# Altium PCB Temp_datalogger.PcbDoc
Units mil, origin at the board's own origin, x right, y up, seen from the top; angles counter-clockwise.
Board outline 1565 x 1538 mil, 2 copper layers (Top Layer, Bottom Layer); 49 components, 47 nets, 186 pads, 21 vias.
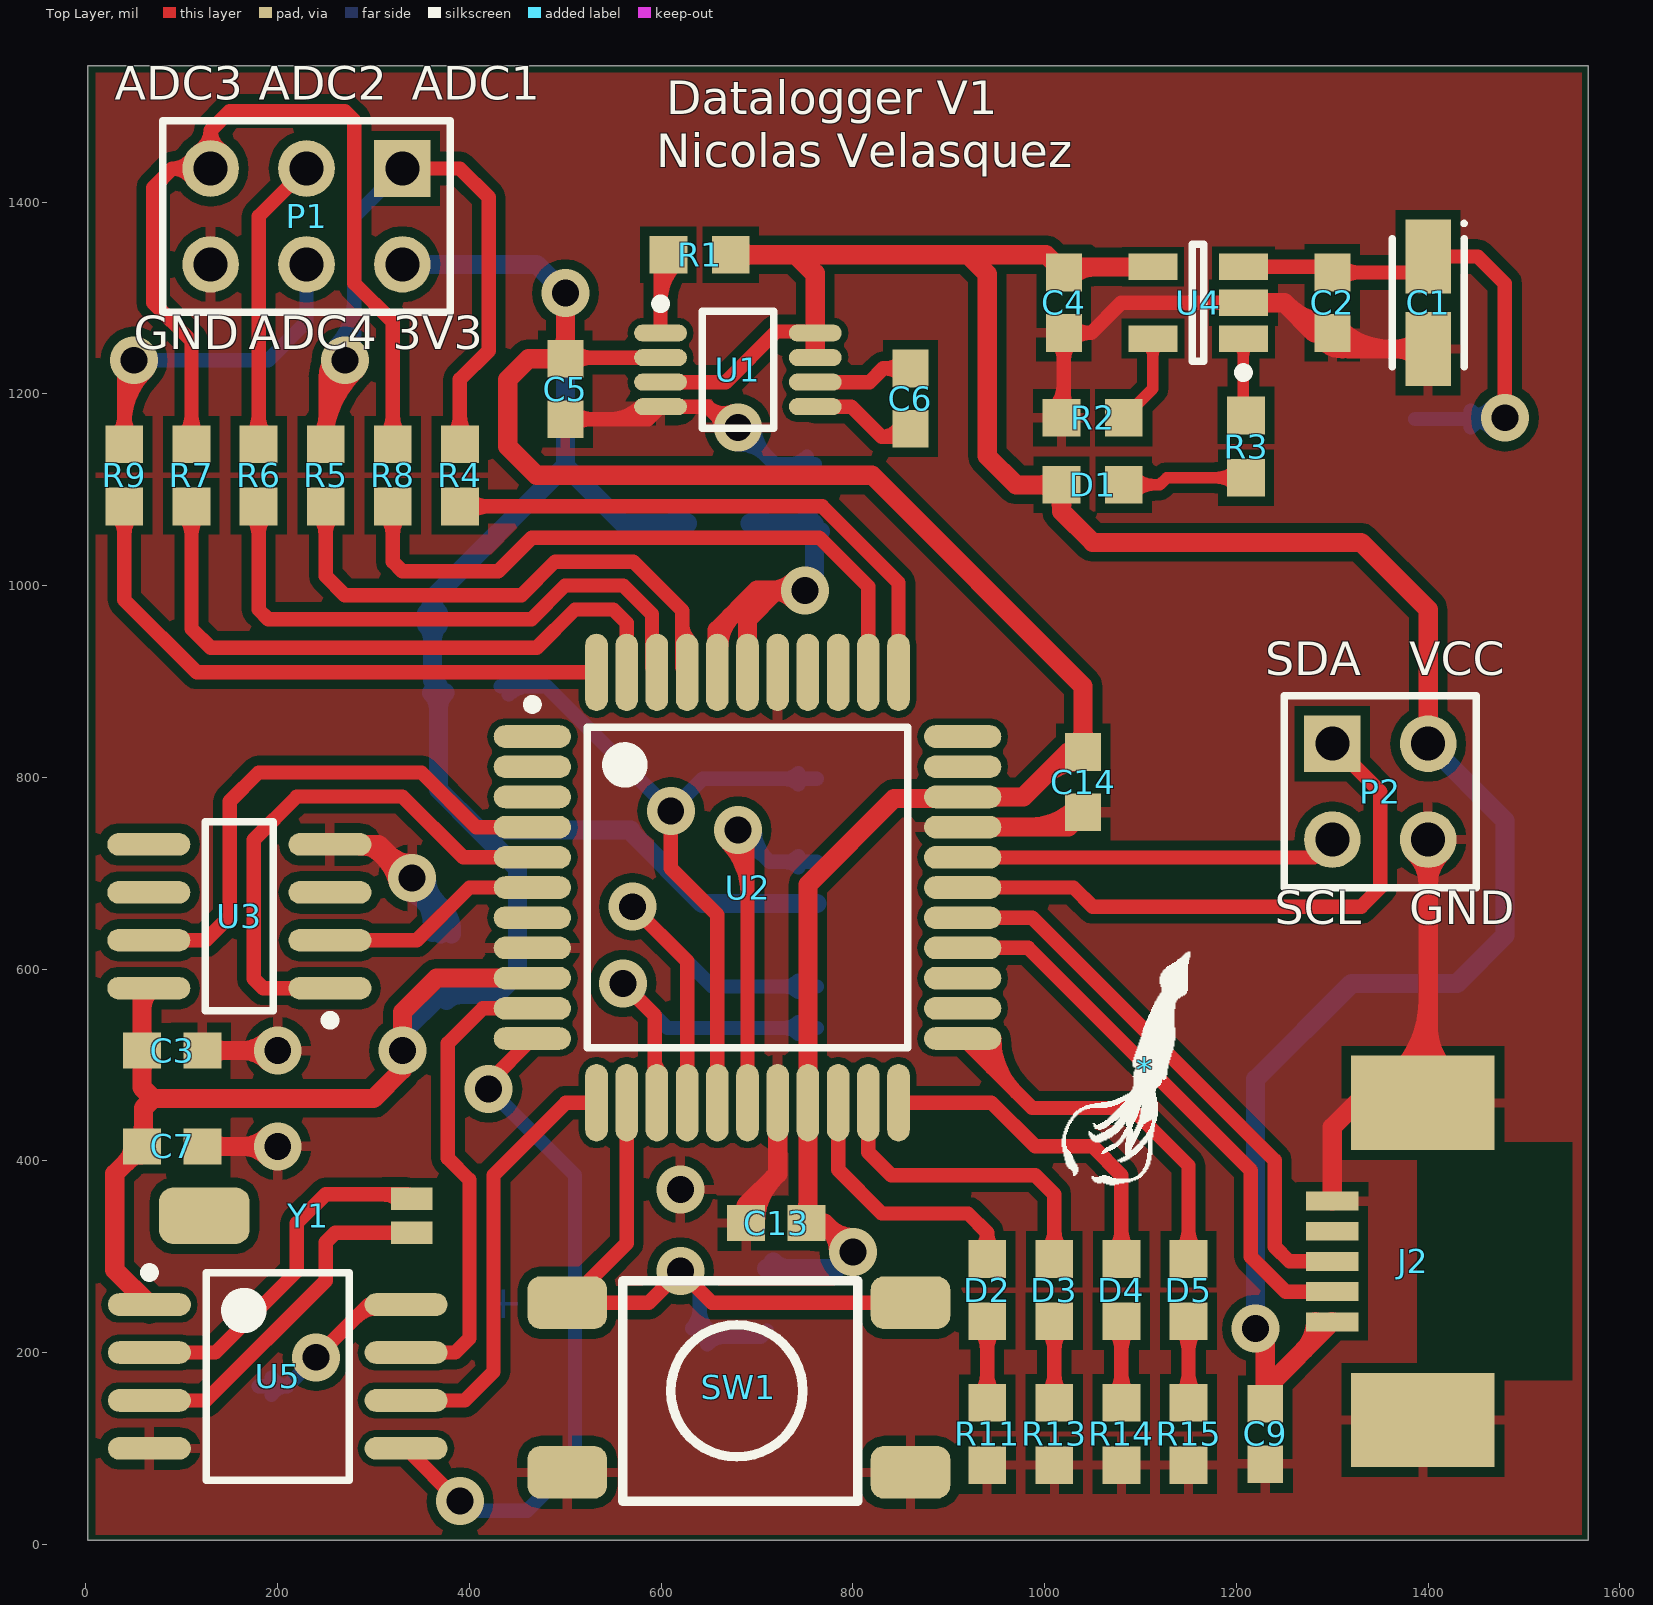
[diagram p0: Top Layer view]
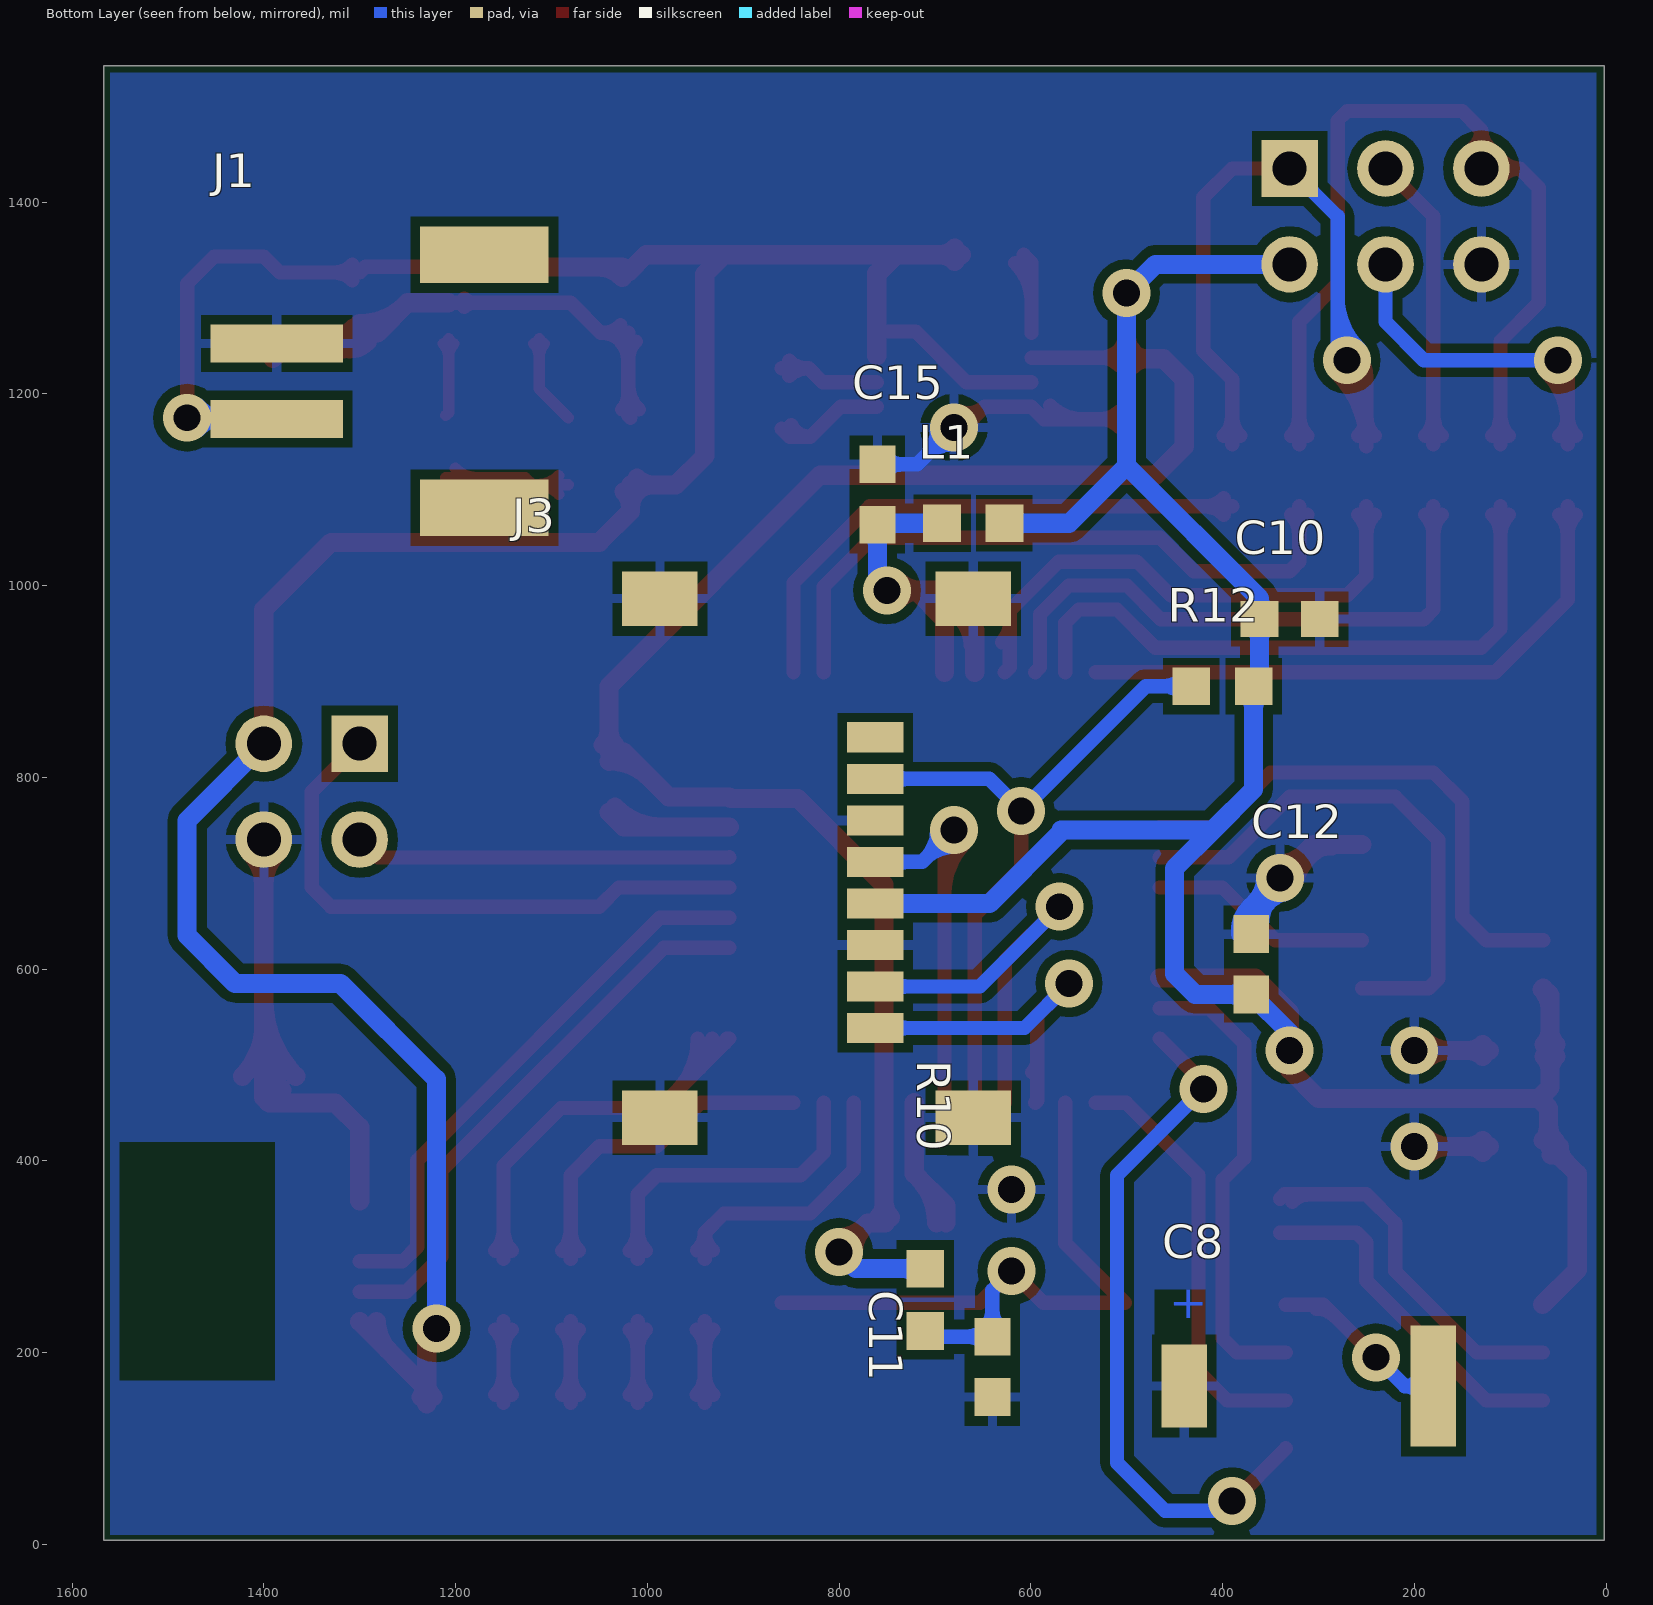
[diagram p1: Bottom Layer view, seen from below]

## Layer stack, top to bottom
Top Layer: signal copper 1.4
Dielectric: dielectric 12.6, FR-4, Dk 4.8
Bottom Layer: signal copper 1.4

## Board outline
2,4 2,1542 1567,1542 1567,4

## Design rules (kind name [scope] priority, off if disabled: settings)
Clearance clearance_fine_pitch [(HasFootprint('44A_M') OR HasFootprint('MSOP-MS8_L') OR HasFootprint('SOIC8WA_N') Or HasFootprint('SOT-23-OT5_M'))] p1: gap=7
Clearance CLEARANCE_TOP [OnLayer('Top Layer')] p2: gap=10
Clearance CLEARANCE_BOTTOM [OnLayer('Bottom Layer')] p3: gap=10
MinimumSolderMaskSliver [All] p1: minsoldermaskwidth=9
PolygonConnect [All] p1: connectstyle=Relief reliefconductorwidth=10 reliefentries=4 polygonreliefangle="90 Angle" airgapwidth=10
RoutingVias [All] p1: holewidth=28 width=50 viastyle="Through Hole" minholewidth=28 minwidth=50 maxholewidth=28 maxwidth=50
SilkToSilkClearance [All] p1: silktosilkclearance=1
SilkToSolderMaskClearance [IsPad] p1: minsilkscreentomaskgap=4 clearancetoexposedcopper=TRUE
SolderMaskExpansion [All] p1: expansion=4
Width power [(InNet('3V3') OR InNet('GND') OR InNet('VCC'))] p1: maxlimit=25 minlimit=15 preferedwidth=20
Width [All] p2: maxlimit=30 minlimit=12 preferedwidth=15
25 further rules are at their usual default settings.

## Components (designator, comment, footprint, x,y, rotation, side; value= is the part's Value field where it differs from the comment)
* "Logo_DeepSea" DeepSea_logo1 1105,495 r0 top
C1 "10uF" C_TANT_A_3216_N 1400,1295 r270 top
C2 "0.1uF" C0603_N 1300,1295 r90 top
C3 "0.1uF" C0603_N 90,515 r180 top
C4 "0.1uF" C0603_N 1020,1295 r90 top
C5 "0.1uF" C0603_N 500,1205 r90 top
C6 "0.1uF" C0603_N 860,1195 r90 top
C7 "0.1uF" C0603_N 90,415 r180 top
C8 "SUPER_CAP" 414-VA5R 310,165 r180 bottom
C9 "0.1uF" C0603_N 1230,115 r90 top
C10 "0.1uF" C0603_N 330,965 r180 bottom
C11 "0.1uF" C0603_N 640,185 r270 bottom
C12 "0.1uF" C0603_N 370,605 r270 bottom
C13 "0.1uF" C0603_N 720,335 r0 top
C14 "0.1uF" C0603_N 1040,795 r90 top
C15 "0.1uF" C0603_N 760,1095 r270 bottom
D1 "Green" R0603_N 1050,1105 r0 top
D2 "Blue" R0603_N 940,265 r270 top
D3 "Green" R0603_N 1010,265 r270 top
D4 "Green" R0603_N 1080,265 r270 top
D5 "Red" R0603_N 1150,265 r270 top
J1 "JST-PH-2PINS" JST-PH-2 1170,1345 r270 bottom
J2 "MINI_USB" "USB MINI" 1300,295 r90 top
J3 "SD_CARD" MICRO_SD-SOCKET 660,445 r90 bottom
L1 "Inductor" R0603_N 660,1065 r0 bottom
P1 "Header 3X2" HDR2X3 330,1435 r180 top
P2 "Header 2X2" HDR2X2 1300,835 r270 top
R1 "R_SMD" R0603_N 640,1345 r0 top
R2 "R_SMD" R0603_N 1050,1175 r0 top
R3 "R_SMD" R0603_N 1210,1145 r90 top
R4 "R_SMD" R0603_N 390,1115 r90 top
R5 "R_SMD" R0603_N 250,1115 r90 top
R6 "R_SMD" R0603_N 180,1115 r90 top
R7 "R_SMD" R0603_N 110,1115 r90 top
R8 "R_SMD" R0603_N 320,1115 r90 top
R9 "R_SMD" R0603_N 40,1115 r90 top
R10 "R_SMD" R0603_N 710,255 r90 bottom
R11 "R_SMD" R0603_N 940,115 r90 top
R12 "R_SMD" R0603_N 400,895 r180 bottom
R13 "R_SMD" R0603_N 1010,115 r90 top
R14 "R_SMD" R0603_N 1080,115 r90 top
R15 "R_SMD" R0603_N 1150,115 r90 top
SW1 "SWITCH" SWICH_FOOT 860,75 r180 top
U1 "MCP1252-33X50I/MS" MSOP-MS8_L 680,1225 r0 top
U2 "ATXMEGA32A4U-AU" 44A_M 690,685 r0 top
U3 "LM74CIMX-3" M08A_N 160,655 r180 top
U4 "MCP73831T-2ACI/OT" SOT-23-OT5_M 1160,1295 r180 top
U5 "DS1302S" SOIC8WA_N 200,175 r0 top
Y1 "XTAL_SMD" XTAL_SMD-3 340,325 r0 top

## Footprints (in the part's own frame and the unit in brackets; to place one, negate y for a bottom-side part, rotate by r counter-clockwise, add the part's x,y. Pads: shape width x height; smd on the part's side, far side on the other; paste and mask are expansions set on the pad)
44A_M [mm] "Thin QFP, 44-Leads, Body 10x10mm, Pitch 0.8mm, IPC Low Density"
  oval 2.05x0.6 smd: 1(-5.7,4) 2(-5.7,3.2) 3(-5.7,2.4) 4(-5.7,1.6) 5(-5.7,0.8) 6(-5.7,0) 7(-5.7,-0.8) 8(-5.7,-1.6) 9(-5.7,-2.4) 10(-5.7,-3.2) 11(-5.7,-4) 23(5.7,-4) 24(5.7,-3.2) 25(5.7,-2.4) 26(5.7,-1.6) 27(5.7,-0.8) 28(5.7,0) 29(5.7,0.8) 30(5.7,1.6) 31(5.7,2.4) 32(5.7,3.2) 33(5.7,4)
  oval 0.6x2.05 smd: 12(-4,-5.7) 13(-3.2,-5.7) 14(-2.4,-5.7) 15(-1.6,-5.7) 16(-0.8,-5.7) 17(0,-5.7) 18(0.8,-5.7) 19(1.6,-5.7) 20(2.4,-5.7) 21(3.2,-5.7) 22(4,-5.7) 34(4,5.7) 35(3.2,5.7) 36(2.4,5.7) 37(1.6,5.7) 38(0.8,5.7) 39(0,5.7) 40(-0.8,5.7) 41(-1.6,5.7) 42(-2.4,5.7) 43(-3.2,5.7) 44(-4,5.7)
  silkscreen extent -5.82,-4.25 4.25,4.97, body extent -5,-5 5,5, height 1.2
414-VA5R [mm] "super cap footprint"
  rect 1.2x3.2 smd: 1(3.3,0)
  rect 1.2x2.2 smd: 2(-3.3,0)
  body extent -2.38,-2.4 2.4,2.4, height 1.1
C0603_N [mm] "Chip Capacitor, 2-Leads, Body 1,60x0,80mm, IPC Medium Density"
  rect 1x0.95 smd: 1(-0.8,0) 2(0.8,0)
  body extent -0.88,-0.48 0.87,0.48, height 0.85
C_TANT_A_3216_N [mm] "Molded Capacitor, 2-Leads, Body 3,20x1,60mm, IPC Medium Density"
  rect 1.95x1.2 smd: 1(-1.225,0) 2(1.225,0)
  silkscreen extent -2.15,-0.95 1.7,1, body extent -1.7,-0.9 1.7,0.9, height 1.8
DeepSea_logo1 [mil]
  silkscreen extent -87,-120 47,123
HDR2X2 [mm] "Connector; Header; 2x2 Position"
  rect 1.5x1.5 hole 0.9: 1(0,0)
  round 1.5 hole 0.9: 2(0,2.54) 3(2.54,0) 4(2.54,2.54)
  silkscreen extent -1.27,-1.27 3.81,3.81
HDR2X3 [mm] "Connector; Header; 3x2 Position"
  rect 1.5x1.5 hole 0.9: 1(0,0)
  round 1.5 hole 0.9: 2(0,2.54) 3(2.54,0) 4(2.54,2.54) 5(5.08,0) 6(5.08,2.54)
  silkscreen extent -1.27,-1.27 6.35,3.81
JST-PH-2 [mm]
  rect 1x3.5 smd: 1(2.35,-5.5) 2(4.35,-5.5)
  rect 1.5x3.4 smd: ""(0,0) ""(6.7,0)
  body extent 0.4,-7.15 6.3,0.45, height 4.8
M08A_N [mm] "SOIC, 8-Leads, Body 4.9x3.9mm, Pitch 1.27mm, IPC Medium Density"
  oval 2.2x0.6 smd: 1(-2.4,1.905) 2(-2.4,0.635) 3(-2.4,-0.635) 4(-2.4,-1.905) 5(2.4,-1.905) 6(2.4,-0.635) 7(2.4,0.635) 8(2.4,1.905)
  silkscreen extent -2.53,-2.5 0.9,2.88, body extent -2,-2.5 2,2.5, height 1.75
MICRO_SD-SOCKET [mm]
  rect 0.8x1.5 smd: 1(2.375,2.6) 2(3.475,2.6) 3(4.575,2.6) 4(5.675,2.6) 5(6.775,2.6) 6(7.875,2.6) 7(8.975,2.6) 8(10.075,2.6)
  rect 1.45x2 smd: G1(13.75,0) G2(13.75,8.3) G3(0,8.3) G4(0,0)
  body extent -0.48,-3.65 14.12,12.35, height 1.67
MSOP-MS8_L [mm] "TSOP, 8-Leads, Body 3x3mm, Pitch 0.65mm, IPC High Density"
  oval 1.4x0.45 smd: 1(-2.05,0.975) 2(-2.05,0.325) 3(-2.05,-0.325) 4(-2.05,-0.975) 5(2.05,-0.975) 6(2.05,-0.325) 7(2.05,0.325) 8(2.05,0.975)
  silkscreen extent -2.17,-1.55 0.95,1.87, body extent -1.6,-1.6 1.6,1.6, height 1.1
R0603_N [mm] "Chip Resistor, 2-Leads, Body 1,60x0,85mm, IPC Medium Density"
  rect 1x1 smd: 1(-0.825,0) 2(0.825,0)
  body extent -0.87,-0.48 0.87,0.47, height 0.45
SOIC8WA_N [mm] "SOP, 8-Leads, Body 5.3x5.3mm, Pitch 1.27mm, IPC Medium Density"
  oval 2.2x0.6 smd: 1(-3.4,1.905) 2(-3.4,0.635) 3(-3.4,-0.635) 4(-3.4,-1.905) 5(3.4,-1.905) 6(3.4,-0.635) 7(3.4,0.635) 8(3.4,1.905)
  silkscreen extent -3.52,-2.75 1.9,2.88, body extent -2.73,-2.75 2.73,2.75, height 2.13
SOT-23-OT5_M [mm] "SOT23, 5-Leads, Body 2.9x1.6mm, Pitch 0.95mm, Lead Span 2.7mm, IPC Low Density"
  rect 1.3x0.7 smd: 1(-1.2,0.95) 2(-1.2,0) 3(-1.2,-0.95) 4(1.2,-0.95) 5(1.2,0.95)
  silkscreen extent -1.33,-1.55 0.15,1.97, body extent -0.9,-1.55 0.9,1.55, height 1.45
SWICH_FOOT [mil]
  rrect50% 83x55 smd: 1(0,0) 1(358,0) 2(0,-177) 2(358,-177)
  silkscreen extent 55,-200 300,30, body extent 57,-201 300,29, height 138
"USB MINI" [mm]
  rect 0.5x1.4 smd: 1(-1.6,0) 2(-0.8,0) 3(0,0) 4(0.8,0) 5(1.6,0)
  rect 2.5x3.8 smd: Shd(-4.2,-2.4) Shd(4.2,-2.4)
  rect 5.8x3.6 on Keep-Out: ""(0,-4.3)
  body extent -4.95,-7.14 4.95,0, height 4.4
XTAL_SMD-3 [mm] "Xtal smd for cilindrical crystal"
  rect 1.1x0.6 smd: 1(0,0) 2(0,0.9)
  rrect50% 2.4x1.5 smd: ""(-5.5,0.45)
  body extent -6.47,-0.3 -1.28,1.13, height 0.72

## Part data
C1: library part CP_SMD
C2 C3 C4 C5 C6 C7 C9 C10 C11 C12 C13 C14 C15: library part C_SMD
C8: "CAP SUPER 0.06F 3.3V COIN SMD"
D1 D2 D3 D4 D5: library part LED_SMD
J1: "CONN HEADER PH SIDE 2POS 2MM SMD"
J2: "CONN RCPT USB MINI B R/A SMD"
J3: "CONN MEMORY CARD R/A 8POS SMD"
P1: "Header, 3-Pin, Dual row"
P2: "Header, 2-Pin, Dual row"
SW1: "SWITCH TACTILE SPST-NO 0.05A 12V"
U1: "IC REG MULTI CONFIG 0.12A 8MSOP"
U2: "IC MCU 8BIT 32KB FLASH 44TQFP"
U3: "SPI/MICROWIRE 12-Bit Plus Sign Temperature Sensor, 8-pin Narrow SOIC"
U4: "IC CONTROLLR LI-ION 4.2V SOT23-5"
U5: "IC TIMEKEEPER T-CHARGE 8-SOIC"

## Via types
v1: diameter 50, hole 28, Top Layer to Bottom Layer, tented both sides, 21 vias

## Nets (pads, with @x,y where several pads share a name; then routed paths per layer and width w, separated by ;. In a path a pad name is that pad's centre, name@x,y a point inside that pad or via, vN(x,y) a via of type N, cw(c..) or ccw(c..) an arc to the next point about the centre after c; other vN are vias at no path point)
3V3: C3.2 C5.2 C7.2 C10.1 C12.2 C13.2 C14.2 J3.4 L1.1 P1.2 R10.2 R12.2 U1.2 U2.9 U2.19 U2.31 U3.8 U5.1 | length 5115.8
  Top Layer w15: C5.2 501.3,1237.8 U1.2 ; C5.2@507.92,1229.56 cw(c527.8,1209.68) 527.8,1237.8 ; C5.2@507.92,1245.4 ccw(c526.28,1263.76) 526.28,1237.8
  Top Layer w20: C7.2@41.97,398.47 ccw(c25.44,415) C7.2@48.82,415 ; C7.2@44.35,400.84 cw(c57.52,387.67) C7.2@57.52,406.3 ; C3.2@52.35,508.85 cw(c37.5,493.99) 58.5,493.99 cw(c79.51,493.99) C3.2@64.66,508.85 ; C3.2@52.35,521.15 ccw(c37.5,536.01) 58.5,536.01 ccw(c79.51,536.01) C3.2@64.66,521.15 ; C7.2@53.34,421.15 ccw(c37.25,437.24) 60,437.24 ; 58.5,558.71 cw(c86.8,558.71) U3.8@66.79,578.72 ; 60,434.77 ccw(c79.26,434.77) C7.2@65.64,421.15 ; U3.8 58.5,572.99 C3.2 58.5,476.5 70,465 ; U5.1 30,286.14 30,386.5 C7.2 60,416.5 60,455 70,465 ; U2.9 365.51,590.51 330,555 v1(330,515) 330,495 300,465 70,465 ; C5.2@493.85,1230.34 ccw(c478.99,1215.49) 478.99,1236.5 ccw(c478.99,1257.5) C5.2@493.85,1242.65 ; C5.2@493.85,1243.63 ccw(c478.99,1258.49) 500,1258.49 ccw(c521.01,1258.49) C5.2@506.15,1243.63 ; v1(500,1305) C5.2 461.5,1236.5 440,1215 440,1145 470,1115 820,1115 1040,895 C14.2 1024.61,826.5 977.6,779.49 U2.31 912.91,777.99 842.99,777.99 752.99,687.99 U2.19 752.99,336.5 C13.2 770,335 v1(800,305) ; C13.2@746.33,341.15 ccw(c730.24,357.24) 752.99,357.24 ; 752.99,354.77 ccw(c772.25,354.77) C13.2@758.63,341.15 ; v1@785,305 ccw(c748.79,305) 774.39,330.61 ccw(c800,356.21) v1@800,320 ; 997.19,799.08 cw(c1040,756.27) C14.2@1040,816.81 ; C14.2@1033.85,833.63 ccw(c1018.99,848.49) 1040,848.49 ccw(c1061.01,848.49) C14.2@1046.15,833.63
  Bottom Layer w20: v1(330,515) 330,533.5 C12.2 428.5,573.5 450,595 450,705 410,745 ; P1.2 470,1335 v1(500,1305) 500,1125 ; C10.1@355.34,958.85 cw(c340.49,943.99) 361.5,943.99 cw(c382.5,943.99) C10.1@367.65,958.85 ; C10.1@355.34,971.15 ccw(c340.49,986.01) 361.5,986.01 ccw(c382.5,986.01) C10.1@367.65,971.15 ; R12.2@360.67,888.15 cw(c344.14,871.62) 367.52,871.62 cw(c390.9,871.62) R12.2@374.37,888.15 ; C12.2@376.15,567.35 cw(c391.01,552.5) 391.01,573.5 cw(c391.01,594.51) C12.2@376.15,579.66 ; 568.18,743.18 642.94,668.43 J3.4 ; 568.18,745 410,745 ; L1.1@620.67,1058.15 ccw(c604.14,1041.62) 604.14,1065 ccw(c604.14,1088.38) L1.1@620.67,1071.85 ; L1.1 560,1065 500,1125 ; R10.2 782.48,287.48 v1(800,305) ; R10.2@716.85,280.63 cw(c733.38,264.1) 733.38,287.48 cw(c733.38,310.86) R10.2@716.85,294.33 ; 410,745 367.52,787.48 R12.2 361.5,901.02 C10.1 361.5,986.5 500,1125
ADC1: R5.1 U2.41 | length 623.2
  Top Layer w15: R5.1@241.38,1073.9 cw(c220.58,1053.1) 250,1053.1 cw(c279.42,1053.1) R5.1@258.62,1073.9 ; R5.1 250,1010 270,990 454.29,990 489.29,1025 570.71,1025 621.82,973.89 621.82,914.59 U2.41 ; 621.82,960.88 ccw(c649.93,960.88) U2.41@630.06,941
ADC2: R6.1 U2.42 | length 657.9
  Top Layer w15: R6.1@171.38,1073.9 cw(c150.58,1053.1) 180,1053.1 cw(c209.42,1053.1) R6.1@188.62,1073.9 ; R6.1 180,975 190,965 464.64,965 499.64,1000 560.36,1000 590.33,970.03 590.33,914.59 U2.42
ADC3: R7.1 U2.43 | length 710
  Top Layer w15: R7.1@101.38,1073.9 cw(c80.58,1053.1) 110,1053.1 cw(c139.42,1053.1) R7.1@118.62,1073.9 ; R7.1 110,955 130,935 470,935 510,975 550,975 564.02,960.98 U2.43
ADC4: R9.1 U2.44 | length 667.6
  Top Layer w15: R9.1@31.38,1073.9 cw(c10.58,1053.1) 40,1053.1 cw(c69.42,1053.1) R9.1@48.62,1073.9 ; R9.1 40,985 115.59,909.41 U2.44
AVCC: C15.2 L1.2 U2.39 U2.40 | length 595.8
  Top Layer w20: U2.40 658.5,953.5 700,995 720,995 ; U2.40@660.32,937.95 cw(c702.23,937.95) 672.59,967.59 ; U2.39 690,965 720,995 ; v1@738,986 ccw(c720,972.5) 720,995 ; v1@738,1004 cw(c720,1017.5) 720,995 ; v1@739.39,984.39 ccw(c713.79,958.79) 713.79,995 ccw(c713.79,1031.21) v1@739.39,1005.61
  Bottom Layer w20: L1.2 758.5,1065 C15.2 760,1005 v1(750,995) ; L1.2@699.33,1058.15 cw(c715.86,1041.62) 715.86,1065 cw(c715.86,1088.38) L1.2@699.33,1071.85 ; 737.76,1065 cw(c737.76,1042.25) C15.2@753.85,1058.34 ; 740.23,1065 ccw(c740.23,1084.26) C15.2@753.85,1070.64 ; C15.2@753.85,1056.37 cw(c738.99,1041.51) 760,1041.51 cw(c781.01,1041.51) C15.2@766.15,1056.37
GND: C1.2 C2.1 C3.1 C4.1 C5.1 C7.1 C8.2 C9.1 C10.2 C11.2 C12.1 C13.1 C14.1 C15.1 J1.1 J2.5 J2.Shd J3.3 J3.6 J3.G1 J3.G2 J3.G3 J3.G4 P1.6 P2.4 R2.1 R11.1 R13.1 R14.1 R15.1 SW1.1 U1.4 U2.8 U2.18 U2.30 U2.38 U3.4 U4.2 U5.4 | length 3385.9
  Top Layer w15: C5.1 586.18,1173.5 U1.4 648.39,1186.61 ; C5.1@507.92,1165.58 cw(c527.04,1146.46) 527.04,1173.5 cw(c527.04,1200.55) C5.1@507.92,1181.42 ; 545.66,1173.5 ccw(c545.66,1221.54) U1.4@579.63,1187.57 ; 657.2,1177.8 cw(c644.39,1165) v1@662.5,1165 ; v1@673.65,1181.31 cw(c665.08,1203.31) 648.39,1186.61 ; v1(680,1165) 670,1165 648.39,1186.61 ; R2.1@1008.9,1183.62 ccw(c982.11,1210.41) 1020,1210.41 ; C4.1@1012.08,1254.6 cw(c992.96,1235.48) 1020,1235.48 cw(c1047.04,1235.48) C4.1@1027.92,1254.6 ; R2.1 1020,1177.48 C4.1 1048.5,1263.5 1080,1295 U4.2 ; 1020,1198.43 ccw(c1040.95,1198.43) R2.1@1026.14,1183.62 ; C4.1@1027.92,1255.58 cw(c1047.04,1236.46) 1047.04,1263.5 cw(c1047.04,1290.55) C4.1@1027.92,1271.42 ; U4.2@1190.99,1290.56 ccw(c1180.27,1279.84) 1180.27,1295 ccw(c1180.27,1310.16) U4.2@1190.99,1299.44
  Top Layer w20: C7.1 v1(200,415) ; C3.1 v1(200,515) ; C7.1@128.63,408.85 cw(c143.49,393.99) 143.49,415 cw(c143.49,436.01) C7.1@128.63,421.15 ; C3.1@128.63,508.85 cw(c143.49,493.99) 143.49,515 cw(c143.49,536.01) C3.1@128.63,521.15 ; v1@189.39,404.39 ccw(c163.79,378.79) 163.79,415 ccw(c163.79,451.21) v1@189.39,425.61 ; v1@189.39,504.39 ccw(c163.79,478.79) 163.79,515 ccw(c163.79,551.21) v1@189.39,525.61 ; U3.4 305,730 v1(340,695) ; U3.4@285.98,728.19 cw(c285.98,677.91) 321.54,713.46 ; 297.89,727.12 cw(c268.25,675.77) v1@325.51,691.12 ; 318.16,715.41 cw(c310.48,702.1) v1@325.42,698.51 ; v1@325,695 ccw(c288.79,695) 314.39,720.61 ccw(c340,746.21) v1@340,710 ; C13.1 688.5,353.5 721.5,386.5 U2.18 ; C13.1@698.19,335 cw(c766.24,335) 718.12,383.12 ; U2.30 1024.49,747.99 C14.1 ; 983.92,747.99 ccw(c983.92,818.6) C14.1@1033.85,768.67 ; U4.2 1250,1295 1281.5,1263.5 C2.1 1316.73,1246.77 C1.2 ; 1251.88,1293.12 ccw(c1300,1341.24) C2.1@1300,1273.19 ; C2.1@1292.01,1254.53 ccw(c1310.74,1273.26) C2.1@1310.74,1246.77 ; J2.5 1300,435 1325.35,460.35 1394.49,460.35 1400,465.87 P2.4 ; C2.1@1306.15,1268.67 ccw(c1359.02,1321.54) 1359.02,1246.77 ; J2.Shd@1366.76,488.08 ccw(c1286.51,568.33) 1400,568.33 ; J2.Shd@1380.9,473.94 ccw(c1334.8,520.04) 1400,520.04 ; P2.4@1386.19,721.19 cw(c1352.86,687.86) 1400,687.86 cw(c1447.14,687.86) P2.4@1413.81,721.19 ; C1.2@1390.37,1237.14 ccw(c1367.11,1213.89) 1367.11,1246.77 ccw(c1367.11,1279.66) C1.2@1390.37,1256.4 ; 1400,541.72 ccw(c1475.85,541.72) J2.Shd@1422.22,488.08
  Bottom Layer w15: v1@680,1147.5 cw(c680,1105.25) 709.87,1135.13 cw(c739.75,1165) v1@697.5,1165 ; v1(680,1165) 718.5,1126.5 C15.1 ; C15.1@752.08,1118.58 ccw(c732.96,1099.45) 732.96,1126.5 ccw(c732.96,1153.54) C15.1@752.08,1134.42
  Bottom Layer w20: v1@336.12,680.51 cw(c326.74,645.53) 358.11,663.64 cw(c389.47,681.75) v1@354.49,691.12 ; v1@340,680 cw(c340,643.79) 365.61,669.39 cw(c391.21,695) v1@355,695 ; C12.1@361.32,638.08 ccw(c288.12,643.11) v1(340,695) 370,665 C12.1 ; C12.1@363.85,643.63 ccw(c348.99,658.49) 370,658.49 ccw(c391.01,658.49) C12.1@376.15,643.63 ; 371.08,663.92 cw(c346.27,639.11) C12.1@381.27,636.7
  other v1: 620,370
LED1: D2.1 U2.20 | length 321.9
  Top Layer w15: U2.20 784.49,390.51 830,345 920,345 940,325 ; D2.1@931.81,306.5 ccw(c915.02,325) 940,325 ; D2.1 940,325 ; D2.1@948.19,306.5 cw(c964.98,325) 940,325
LED2: D3.1 U2.21 | length 377.6
  Top Layer w15: U2.21 815.98,409.02 840,385 990,385 1010,365 D3.1 ; D3.1@1001.38,306.1 ccw(c980.58,326.9) 1010,326.9 ccw(c1039.42,326.9) D3.1@1018.62,306.1
LED3: D4.1 U2.22 | length 397.6
  Top Layer w15: U2.22 944.41,460.59 990,415 1050,415 1080,385 D4.1 ; D4.1@1071.38,306.1 ccw(c1050.58,326.9) 1080,326.9 ccw(c1109.42,326.9) D4.1@1088.62,306.1
LED4: D5.1 U2.23 | length 535.8
  Top Layer w15: U2.23 986.93,455 1090,455 1150,395 D5.1 ; U2.23@917.26,527.52 ccw(c924.15,527.52) U2.23@919.28,522.65 ; U2.23@932.26,527.52 ccw(c975.37,527.52) 944.89,497.04 ; U2.23@947.26,527.52 ccw(c1026.58,527.52) 970.5,471.43 ; D5.1@1141.38,306.1 ccw(c1120.58,326.9) 1150,326.9 ccw(c1179.42,326.9) D5.1@1158.62,306.1
NetC6_1: C6.1 U1.5 | length 140.7
  Top Layer w15: U1.5 798.39,1186.61 830,1155 ; C6.1@849.94,1167.44 cw(c830,1177.2) 830,1155 ; C6.1 851.5,1155 830,1155
NetC6_2: C6.2 U1.6 | length 147.7
  Top Layer w15: U1.6 817.2,1212.2 831.5,1226.5 C6.2 ; C6.2@852.08,1218.58 ccw(c832.96,1199.45) 832.96,1226.5 ccw(c832.96,1253.54) C6.2@852.08,1234.42
NetC8_1: C8.1 U5.8 | length 250.1
  Top Layer w15: v1(240,195) 295,250 U5.8 ; 282.43,237.43 cw(c302.36,217.51) U5.8@302.36,245.69
  Bottom Layer w15: C8.1 210,165 ; C8.1@193.54,156.13 cw(c210,145.3) 210,165 ; C8.1@193.54,173.87 ccw(c210,184.7) 210,165 ; v1(240,195) 210,165
NetD1_2: D1.2 R3.1 | length 234.4
  Top Layer w12: D1.2 1120,1105 1127.52,1112.52 R3.1 ; D1.2@1092.16,1095.32 cw(c1115.52,1071.96) 1115.52,1105 cw(c1115.52,1138.04) D1.2@1092.16,1114.68 ; R3.1@1200.32,1102.84 ccw(c1176.96,1079.48) 1176.96,1112.52 ccw(c1176.96,1145.56) R3.1@1200.32,1122.2
NetD2_2: D2.2 R11.2 | length 177.5
  Top Layer w15: R11.2@931.38,156.1 ccw(c910.58,176.9) 940,176.9 ccw(c969.42,176.9) R11.2@948.62,156.1 ; D2.2@931.38,223.9 cw(c910.58,203.1) 940,203.1 cw(c969.42,203.1) D2.2@948.62,223.9 ; R11.2 D2.2
NetD3_2: D3.2 R13.2 | length 177.5
  Top Layer w15: R13.2@1001.38,156.1 ccw(c980.58,176.9) 1010,176.9 ccw(c1039.42,176.9) R13.2@1018.62,156.1 ; D3.2@1001.38,223.9 cw(c980.58,203.1) 1010,203.1 cw(c1039.42,203.1) D3.2@1018.62,223.9 ; R13.2 D3.2
NetD4_2: D4.2 R14.2 | length 177.5
  Top Layer w15: R14.2@1071.38,156.1 ccw(c1050.58,176.9) 1080,176.9 ccw(c1109.42,176.9) R14.2@1088.62,156.1 ; D4.2@1071.38,223.9 cw(c1050.58,203.1) 1080,203.1 cw(c1109.42,203.1) D4.2@1088.62,223.9 ; R14.2 D4.2
NetD5_2: D5.2 R15.2 | length 177.5
  Top Layer w15: R15.2@1141.38,156.1 ccw(c1120.58,176.9) 1150,176.9 ccw(c1179.42,176.9) R15.2@1158.62,156.1 ; D5.2@1141.38,223.9 cw(c1120.58,203.1) 1150,203.1 cw(c1179.42,203.1) D5.2@1158.62,223.9 ; R15.2 D5.2
NetP1_1: P1.1 R4.2 R5.2 | length 1082.1
  Top Layer w15: R5.2@241.38,1156.1 ccw(c220.58,1176.9) 250,1176.9 ccw(c279.42,1176.9) R5.2@258.62,1156.1 ; R5.2@250,1145.23 cw(c358.7,1145.23) v1@282.3,1222.55 ; R5.2 250,1215 ; 250,1181.14 cw(c323.22,1181.14) v1@271.76,1233.22 ; 250,1217.05 cw(c287.74,1217.05) v1@261.21,1243.89 ; v1@253.4,1229.45 cw(c240.03,1224.97) 250,1215 ; v1@264.45,1218.4 ccw(c259.97,1205.03) 250,1215 ; v1(270,1235) 250,1215 ; P1.1 390,1435 420,1405 420,1245 390,1215 R4.2 ; R4.2@381.38,1156.1 ccw(c360.58,1176.9) 390,1176.9 ccw(c419.42,1176.9) R4.2@398.62,1156.1
  Bottom Layer w15: v1@257.63,1247.37 ccw(c203.61,1301.39) 280,1301.39 ; v1@268.23,1236.77 ccw(c239.82,1265.18) 280,1265.18 ; v1(270,1235) 280,1245 280,1385 P1.1
NetP1_3: P1.3 R6.2 | length 354.4
  Top Layer w15: R6.2@171.38,1156.1 ccw(c150.58,1176.9) 180,1176.9 ccw(c209.42,1176.9) R6.2@188.62,1156.1 ; R6.2 180,1385 P1.3
NetP1_4: P1.4 R9.2 | length 486
  Top Layer w15: R9.2@31.38,1156.1 ccw(c10.58,1176.9) 40,1176.9 ccw(c69.42,1176.9) R9.2@48.62,1156.1 ; R9.2 40,1225 v1(50,1235) ; 40,1168.61 cw(c116.39,1168.61) v1@62.37,1222.63 ; 40,1204.82 cw(c80.18,1204.82) v1@51.77,1233.23
  Bottom Layer w15: v1(50,1235) 190,1235 230,1275 P1.4
NetP1_5: P1.5 R7.2 R8.2 | length 1103.2
  Top Layer w15: R7.2@101.38,1156.1 ccw(c80.58,1176.9) 110,1176.9 ccw(c139.42,1176.9) R7.2@118.62,1156.1 ; R7.2 110,1255 70,1295 70,1415 90,1435 ; P1.5@111.38,1423.22 ccw(c90,1409.7) 90,1435 ; P1.5@111.38,1446.78 cw(c90,1460.3) 90,1435 ; P1.5@118.22,1453.62 ccw(c104.7,1475) 130,1475 ; P1.5@141.78,1453.62 cw(c155.3,1475) 130,1475 ; R8.2@311.38,1156.1 ccw(c290.58,1176.9) 320,1176.9 ccw(c349.42,1176.9) R8.2@328.62,1156.1 ; R8.2 320,1275 280,1315 280,1485 270,1495 150,1495 130,1475 ; 90,1435 P1.5 130,1475
NetR1_1: R1.1 U1.1 | length 130.2
  Top Layer w15: U1.1 599.29,1336.77 R1.1 ; 599.29,1295.72 cw(c656.8,1295.72) R1.1@616.14,1336.38
NetR2_2: R2.2 U4.5 | length 124.6
  Top Layer w12: R2.2 1112.76,1205.28 U4.5 ; U4.5@1107.25,1252.1 cw(c1093.97,1238.82) 1112.76,1238.82 cw(c1131.54,1238.82) U4.5@1118.26,1252.1
NetR3_2: R3.2 U4.1 | length 110.8
  Top Layer w12: U4.1@1201.74,1252.1 cw(c1188.46,1238.82) 1207.24,1238.82 cw(c1226.03,1238.82) U4.1@1212.75,1252.1 ; U4.1 1207.24,1180.24 R3.2
NetU5_2: U5.2 Y1.2 | length 393.8
  Top Layer w15: U5.2 135,200 220,285 220,335 250,365 335.43,365 Y1.2 ; 308.72,365 cw(c308.72,339) Y1.2@327.11,357.38
NetU5_3: U5.3 Y1.1 | length 369.8
  Top Layer w15: U5.3 125,150 250,275 250,315 260,325 Y1.1
PDI_CLK: R8.1 U2.35 | length 729.1
  Top Layer w15: R8.1@311.38,1073.9 cw(c290.58,1053.1) 320,1053.1 cw(c349.42,1053.1) R8.1@328.62,1073.9 ; R8.1 320,1025 330,1015 430,1015 465,1050 765,1050 815.98,999.02 U2.35
PDI_DATA: R4.1 U2.34 | length 630.1
  Top Layer w15: R4.1 767.84,1082.52 847.48,1002.87 U2.34 ; R4.1@398.62,1073.9 cw(c419.42,1053.1) 419.42,1082.52 cw(c419.42,1111.94) R4.1@398.62,1091.14
RTC_CS: U2.11 U5.5 | length 722.5
  Top Layer w15: U5.5 388.86,45 v1(390,45) ; v1(420,475) 420,481.93 U2.11
  Bottom Layer w15: v1(390,45) 400,35 460,35 510,85 510,385 v1(420,475)
RTC_IO: U2.12 U5.6 | length 447.4
  Top Layer w15: U5.6 395,150 425,180 425,385 500.59,460.59 U2.12
RTC_SCLK: U2.10 U5.7 | length 492.4
  Top Layer w15: U5.7 385,200 400,215 400,380 377.5,402.5 377.5,522.5 414.02,559.02 U2.10
SCL: P2.3 U2.29 | length 393.4
  Top Layer w15: U2.29 914.59,716.32 1281.32,716.32 P2.3
SD_CS: J3.1 U2.14 | length 406.1
  Top Layer w15: v1(560,585) 593.33,551.67 593.33,462.78 U2.14 ; 593.33,504.82 ccw(c611.19,504.82) U2.14@598.56,492.18
  Bottom Layer w15: v1(560,585) 606.5,538.5 J3.1 ; J3.1@742.75,532.67 ccw(c728.67,518.59) 728.67,538.5 ccw(c728.67,558.42) J3.1@742.75,544.34
SD_MISO: J3.7 R12.1 U2.16 | length 799.5
  Top Layer w15: v1(610,765) 610,705 658.5,656.5 U2.16
  Bottom Layer w15: R12.1 480,895 v1(610,765) 643.35,798.35 J3.7 ; R12.1@441.1,886.38 cw(c461.9,865.58) 461.9,895 cw(c461.9,924.42) R12.1@441.1,903.62 ; J3.7@742.75,792.51 ccw(c728.67,778.43) 728.67,798.35 ccw(c728.67,818.26) J3.7@742.75,804.18
SD_MOSI: J3.2 U2.15 | length 486.1
  Top Layer w15: v1(570,665) 627.01,607.99 U2.15
  Bottom Layer w15: v1(570,665) 653.19,581.81 J3.2 ; J3.2@742.75,575.98 ccw(c728.67,561.9) 728.67,581.81 ccw(c728.67,601.72) J3.2@742.75,587.64
SD_SCK: J3.5 U2.17 | length 573.9
  Top Layer w15: v1@667.63,732.63 cw(c613.61,678.61) 690,678.61 ; v1@678.23,743.23 cw(c649.82,714.82) 690,714.82 ; v1(680,745) 690,735 U2.17
  Bottom Layer w15: v1@680,727.5 cw(c680,685.25) 709.87,715.13 cw(c739.75,745) v1@697.5,745 ; v1(680,745) 713.27,711.73 J3.5 ; J3.5@742.75,705.9 ccw(c728.67,691.82) 728.67,711.73 ccw(c728.67,731.64) J3.5@742.75,717.56
SDA: P2.1 U2.28 | length 622.9
  Top Layer w15: U2.28 1030,685 1050,665 1330,665 1350,685 1350,785 P2.1
SW_PROGRAM: C11.1 R10.1 SW1.2 U2.13 | length 853.9
  Top Layer w15: U2.13 564.02,314.02 502,252 587,252 v1(620,285) 653,252 SW1.2@860,252
  Bottom Layer w15: v1(620,285) 640,265 C11.1 703.98,216.5 R10.1 ; C11.1@632.08,225.4 ccw(c612.96,244.52) 640,244.52 ccw(c667.04,244.52) C11.1@647.92,225.4 ; C11.1@647.92,208.58 cw(c667.04,189.45) 667.04,216.5 cw(c667.04,243.54) C11.1@647.92,224.42
TEMP_CLK: U2.6 U3.2 | length 233.9
  Top Layer w15: U3.2 345,630 400,685 U2.6
TEMP_CS: U2.4 U3.7 | length 566.5
  Top Layer w15: U3.7 125,630 150,655 150,775 180,805 350,805 407.01,747.99 U2.4
TEMP_IO: U2.5 U3.1 | length 564.2
  Top Layer w15: U3.1 185,580 175,590 175,735 220,780 330,780 393.5,716.5 U2.5
USB_DM: J2.2 U2.26 | length 586.8
  Top Layer w15: U2.26 982.99,622.01 1215,390 1215,300 1251.5,263.5 J2.2
USB_DP: J2.3 U2.27 | length 586.8
  Top Layer w15: U2.27 986.85,653.5 1240,400.36 1240,310.36 1255.36,295 J2.3
V_BAT: C1.1 C2.2 J1.2 U4.3 | length 706.5
  Top Layer w15: U4.3 1294.09,1332.4 C2.2 1383.27,1326.5 C1.1 1451.77,1343.23 1480,1315 v1(1480,1175) ; C2.2@1307.92,1318.58 cw(c1327.04,1299.45) 1327.04,1326.5 cw(c1327.04,1353.54) C2.2@1307.92,1334.42
  Bottom Layer w15: J1.2 1478.74,1173.74 v1(1480,1175) ; J1.2@1434.71,1173.74 ccw(c1434.71,1220.29) v1@1467.63,1187.37 ; J1.2@1440.79,1173.74 cw(c1440.79,1135.79) v1@1467.63,1162.63 ; J1.2@1444.36,1165.12 cw(c1465.17,1144.32) 1465.17,1173.74 cw(c1465.17,1203.16) J1.2@1444.36,1182.36 ; J1.2@1454.85,1170.97 cw(c1457.05,1162.75) v1@1464.56,1166.76 ; J1.2@1454.85,1170.98 ccw(c1451.86,1182.1) v1@1463.03,1179.28
VCC: C4.2 C9.2 D1.1 J2.1 P2.2 R1.2 U1.3 U1.7 U1.8 U4.4 | length 2842.8
  Top Layer w15: U1.3 667.2,1212.2 720,1265 759.09,1265 U1.8
  Top Layer w20: R1.2 740,1345 ; R1.2@679.33,1338.15 cw(c695.86,1321.62) 695.86,1345 cw(c695.86,1368.38) R1.2@679.33,1351.85 ; U1.7@760.71,1239.7 U1.8 760.71,1325.71 759.29,1325.71 740,1345 ; D1.1@1010.67,1111.85 cw(c994.14,1128.38) 994.14,1105 cw(c994.14,1081.62) 1010.67,1098.15 cw(c994.14,1081.62) 1017.52,1081.62 cw(c1040.9,1081.62) D1.1@1024.37,1098.15 ; C4.2@1026.15,1321.33 cw(c1052.89,1294.59) 1052.89,1332.4 ; U4.4 1025.91,1332.4 C4.2 1001.5,1345 920,1345 ; v1(1220,225) 1230,215 C9.2@1230,162.01 ; C9.2@1223.85,153.63 ccw(c1208.99,168.49) 1230,168.49 ccw(c1251.01,168.49) C9.2@1236.15,153.63 ; C9.2 C9.2@1230,162.01 ; 1270.02,202.03 ccw(c1240.05,232.01) J2.1@1282.44,232.01 ; J2.1 C9.2@1230,162.01 ; P2.2 1400,975 1330,1045 1050,1045 1017.52,1077.48 D1.1 970,1105 940,1135 940,1325 920,1345 ; 740,1345 920,1345
  Bottom Layer w20: v1@1220,235 1220,485 1320,585 1430,585 1480,635 1480,755 P2.2
pads on no net: J1. J2. J2.4 J3.8 U2.1 U2.2 U2.3 U2.7 U2.24 U2.25 U2.32 U2.33 U2.36 U2.37 U3.3 U3.5 U3.6 Y1.

## Polygon pours and split planes (outlines as drawn)
GND on Top Layer "Top Layer-No Net" (solid, remove dead copper, pour order 4): 10,1535 1560,1535 1560,10 1530,10 10,10 10,1535
GND on Bottom Layer "Top Layer-No Net" (solid, remove dead copper, pour order 6): 10,1535 1560,1535 1560,10 10,10 10,1535

## Silkscreen, mask and mechanical layers (free items; w line width, h text height)
Top Overlay:
  text "ADC2" at 180,1495 h60
  text "Datalogger V1" at 605,1480 h60
  text "Nicolas Velasquez" at 595,1425 h60
  text "ADC4" at 170,1235 h60
Mechanical 4:
  the board outline again, w10

## Dimensions
1567,4 to 1567,1542 on Keep-Out Layer
2,4 to 1567,4 on Keep-Out Layer
1567,4 to 1567,1542 on Keep-Out Layer
1567,4 to 2,4 on Keep-Out Layer

## Text inside footprints (layer, text, board x,y; h text height)
C8: Bottom Layer "+" at 455.67,224.06 h60
P1: Top Overlay "ADC1" at 340,1495 h60; Top Overlay "3V3" at 320,1235 h60; Top Overlay "ADC3" at 30,1495 h60; Top Overlay "GND" at 50,1235 h60
P2: Top Overlay "SCL" at 1240,635 h60; Top Overlay "GND" at 1380,635 h60; Top Overlay "VCC" at 1380,895 h60; Top Overlay "SDA" at 1230,895 h60